# EAGLE board Final_v2 (EAGLE 8.6.3)
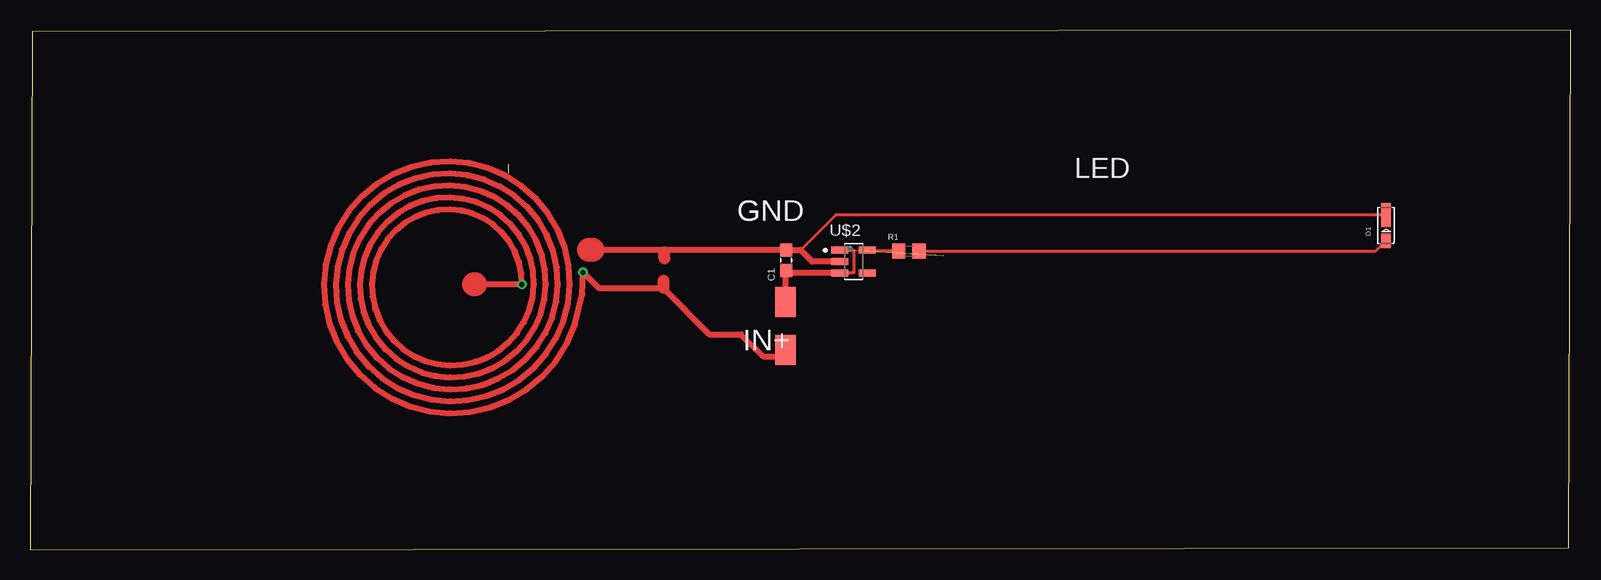
[diagram p0: board, top side]

Size 128.41 x 43.34 mm. Coordinates in mm from the lower left corner, seen from the top.
Outline: 0,0 128.23,0.15 128.41,43.34 0.18,43.2 0,0
Copper layers (1*16): Top 0.035mm / dielectric 1.5mm / Bottom 0.035mm
Design rules "default": minimum track width 6mil, minimum drill 0.35mm, track to track 6mil, track to pad 6mil, pad to pad 6mil, via to via 6mil, smd to smd 6mil, copper to edge 40mil, drill to drill 6mil, minimum pad ring 10mil, minimum via ring 8mil, stop-mask expansion 4mil, vias tented up to drill 0mil, thermal gap 10mil

## Footprints (pad centres in the part's own frame; a part is rotated, then mirrored left to right if it is on the bottom)
CAPC1608X90 = smd 1.1 x 1: 1 -0.85,0; 2 0.85,0
WL-SWTP_3014 = smd 2 x 0.8: 1 0.88,0 | smd 1.2 x 0.8: 2 -1.27,0
RESC1608X55 = smd 1.1 x 1.25: 1 -0.85,0; 2 0.85,0
SMA-DIODE = smd 2.5 x 1.7: 1 -1.992,0.015; 2 2.008,0.015
SOP95P275X110-5N = smd 1.42 x 0.58: 1 -1.145,0.95; 2 -1.145,0; 3 -1.145,-0.95; 4 1.145,-0.95; 5 1.145,0.95

## Placement (x,y rotation side)
C1  06036D225KAT2A  [CAPC1608X90]  63.02,24.14 90 top
D1  WL-SWTP3014  [WL-SWTP_3014]  113,27.04 90 top
R1  CRCW06033K30FKEA  [RESC1608X55]  73.23,24.9 0 top
U$1  B220A-13-F  [SMA-DIODE]  62.98,18.63 90 top
U$2  NCV8161  [SOP95P275X110-5N]  68.62,24.02 0 top

## Library data of the parts
C1 = Capacitor_2.2uF_0603; DESCRIPTION: 0603 2.2 uF 6.3 V ±10 % Tolerance X5R Surface Mount Multilayer Ceramic Capacitor; DIGI-KEY_PART_NUMBER: 478-1252-1-ND; DIGI-KEY_PURCHASE_URL: https://www.digikey.co.uk/product-detail/en/avx-corporation/06036D225KAT2A/478-1252-1-ND/564284?utm_source=snapeda&utm_medium=aggregator&utm_campaign=symbol; MF: AVX; MP: 06036D225KAT2A; PACKAGE: 0603 AVX
D1 = WL-SWTP; DESCRIPTION: SMD LED PLCC2 Daylight white 120 ° 3.2 V Wuerth Elektronik; DIGI-KEY_PART_NUMBER: 732-5661-1-ND; DIGI-KEY_PURCHASE_URL: https://www.digikey.co.uk/product-detail/en/wurth-electronics-inc/158301250/732-5661-1-ND/4947879?utm_source=snapeda&utm_medium=aggregator&utm_campaign=symbol; MF: Wurth Electronics; MP: 158301250; PACKAGE: 1206 Würth Elektronik
R1 = CRCW06033K30FKEA; DESCRIPTION: Res Thick Film 0603 3.3K Ohm 1% 0.1W_1/10W_ ?100ppm/C SMD Automotive Paper T/R; DIGI-KEY_PART_NUMBER: 541-3.30KHCT-ND; DIGI-KEY_PURCHASE_URL: https://www.digikey.com/product-detail/en/vishay-dale/CRCW06033K30FKEA/541-3.30KHCT-ND/1179866?utm_source=snapeda&utm_medium=aggregator&utm_campaign=symbol; MF: Vishay Dale; MP: CRCW06033K30FKEA; PACKAGE: 0603 Vishay
U$1 = Schottky_0603; DESCRIPTION: B220A Series 20 V 2 A Surface Mount Schottky Barrier Rectifier - SMA; DIGI-KEY_PART_NUMBER: B220A-FDICT-ND; DIGI-KEY_PURCHASE_URL: https://www.digikey.co.uk/product-detail/en/diodes-incorporated/B220A-13-F/B220A-FDICT-ND/751528?utm_source=snapeda&utm_medium=aggregator&utm_campaign=symbol; MF: Diodes Inc.; MP: B220A-13-F; PACKAGE: DO-214 Diodes Inc.
U$2 = NCV8161_LDO

## Nets
GND: C1.2 D1.1 U$2.2
IN+: U$1.1
N$1: R1.1 U$2.5
N$2: D1.2 R1.2
N$4: C1.1 U$1.2 U$2.1 U$2.3

## Tracks (layer width: path | path; a pad name or v marks a point on that pad's centre or on a via)
GND
  Top 0.254: C1.2 63.14,24.99 | D1.1 67.14,27.92 64.22,24.99
  Top 0.5: 46.89,25.02 52.65,25.02 60.28,25.02
  Top 0.508: 60.28,25.02 62.98,25.02 C1.2 | U$2.2 65.19,24.02 64.22,24.99 63.14,24.99 | 52.85,24.82 52.65,25.02
  Top 1.016: 52.85,24.31 52.85,24.82
  Top 2: 46.59,25.02 46.89,25.02
IN+  (via drill 0.4 pad 0.5)
  Top 0.5: v46.09,23.12 46.03,21.31 45.4,18.74 44.72,17.16 43.81,15.72 42.68,14.44 41.37,13.35 39.9,12.48 38.33,11.85 36.68,11.48 34.99,11.38 33.31,11.53 31.68,11.95 30.14,12.61 28.73,13.51 27.48,14.61 26.41,15.89 25.57,17.32 24.96,18.86 24.59,20.48 24.49,22.12 24.64,23.76 25.05,25.35 25.7,26.86 26.58,28.24 27.65,29.46 28.91,30.5 30.3,31.32 31.81,31.92 33.38,32.27 34.99,32.38 36.59,32.22 38.14,31.83 39.61,31.19 40.96,30.34 42.15,29.28 43.16,28.06 43.97,26.7 44.55,25.23 44.89,23.69 44.99,22.12 44.84,20.56 44.45,19.05 43.83,17.62 43,16.31 41.97,15.14 40.78,14.16 39.45,13.37 38.02,12.8 36.52,12.47 34.99,12.38 33.47,12.52 31.99,12.9 30.6,13.5 29.32,14.32 28.18,15.32 27.22,16.48 26.46,17.78 25.91,19.17 25.58,20.63 25.49,22.12 25.63,23.61 26,25.04 26.59,26.4 27.39,27.65 28.36,28.75 29.49,29.69 30.76,30.43 32.12,30.97 33.54,31.29 34.99,31.38 36.43,31.24 37.83,30.88 39.15,30.3 40.37,29.53 41.44,28.58 42.35,27.47 43.08,26.24 43.6,24.92 43.9,23.54 43.99,22.12 43.85,20.72 43.5,19.36 42.94,18.07 42.19,16.89 41.27,15.85 40.19,14.96 39,14.26 37.71,13.76 36.36,13.46 34.99,13.38 33.62,13.51 32.3,13.85 31.05,14.39 29.91,15.13 28.89,16.03 28.03,17.07 27.35,18.23 26.86,19.48 26.57,20.79 26.49,22.12 26.62,23.45 26.95,24.74 27.48,25.95 28.19,27.06 29.07,28.05 30.08,28.88 31.21,29.54 32.42,30.02 33.69,30.3 34.99,30.38 36.28,30.25 37.52,29.92 38.7,29.41 39.78,28.72 40.73,27.87 41.54,26.89 42.18,25.79 42.65,24.61 42.92,23.38 42.99,22.12 42.87,20.88 42.55,19.67 42.05,18.53 41.38,17.48 40.56,16.56 39.6,15.77 38.54,15.15 37.4,14.71 36.21,14.45 34.99,14.38 33.78,14.5 32.61,14.8 31.51,15.29 30.49,15.94 29.6,16.73 28.84,17.66 28.24,18.69 27.81,19.79 27.56,20.95 27.49,22.12 27.61,23.29 27.91,24.43 28.37,25.5 29,26.47 29.77,27.34 30.67,28.07 31.67,28.65 32.73,29.07 33.85,29.31 34.99,29.38 36.12,29.26 37.21,28.97 38.25,28.52 39.19,27.91 40.03,27.16 40.73,26.3 41.29,25.34 41.69,24.3 41.93,23.22 41.99,22.12 41.88,21.03 41.6,19.98 41.16,18.98 40.57,18.07 39.85,17.26 39.02,16.58 38.09,16.04 37.09,15.66 36.05,15.43 34.99,15.38 33.94,15.48 32.92,15.75 31.96,16.18 31.08,16.74 30.3,17.44 29.65,18.25 29.13,19.14 28.76,20.1 28.55,21.1 28.49,22.12 28.59,23.14 28.86,24.12 29.27,25.04 29.81,25.89 30.48,26.63 31.26,27.26 32.12,27.76 33.04,28.12 34.01,28.32 34.99,28.38 35.96,28.27 36.91,28.02 37.79,27.63 38.6,27.1 39.32,26.46 39.92,25.71 40.4,24.88 40.74,23.99 40.94,23.07 v40.99,22.12 37.09,22.12
  Top 0.508: U$1.1 62.44,16.12 61.09,16.12 59.24,17.96 56.6,17.96 52.76,21.81 | v46.09,23.12 47.4,21.81 52.76,21.81 | 52.79,21.84 52.76,21.81
  Top 1.016: 52.79,22.44 52.79,21.84
  Top 2: 37.09,22.12 36.99,22.12
N$1
  Top 0.254: R1.1 69.77,24.9 U$2.5
N$2
  Top 0.254: R1.2 112.13,24.9 D1.2
N$4  (2 unrouted)
  Top 0.254: U$2.1 68.66,24.97 68.66,23.09 67.48,23.09 U$2.3
  Top 0.508: U$1.2 62.97,22.98 | 62.97,22.98 62.97,23.24 C1.1 | U$2.3 63.05,23.07 62.97,22.98
N$7  (2 unrouted)

## Text on the board
tPlace: LED | GND | IN+